# Altium PCB P-MT3620EXMSTLP-1-0.PcbDoc (part 2 of 3)
Units mm, origin at the board's own origin, x right, y up, seen from the top; angles counter-clockwise.
Board outline 50 x 80 mm, 4 copper layers (Top Layer, InternalGND, InternalPWR, Bottom Layer), stack 1.534 mm thick; 92 components, 85 nets, 375 pads, 250 vias.
Unrouted connection lines stored in the file: 17.
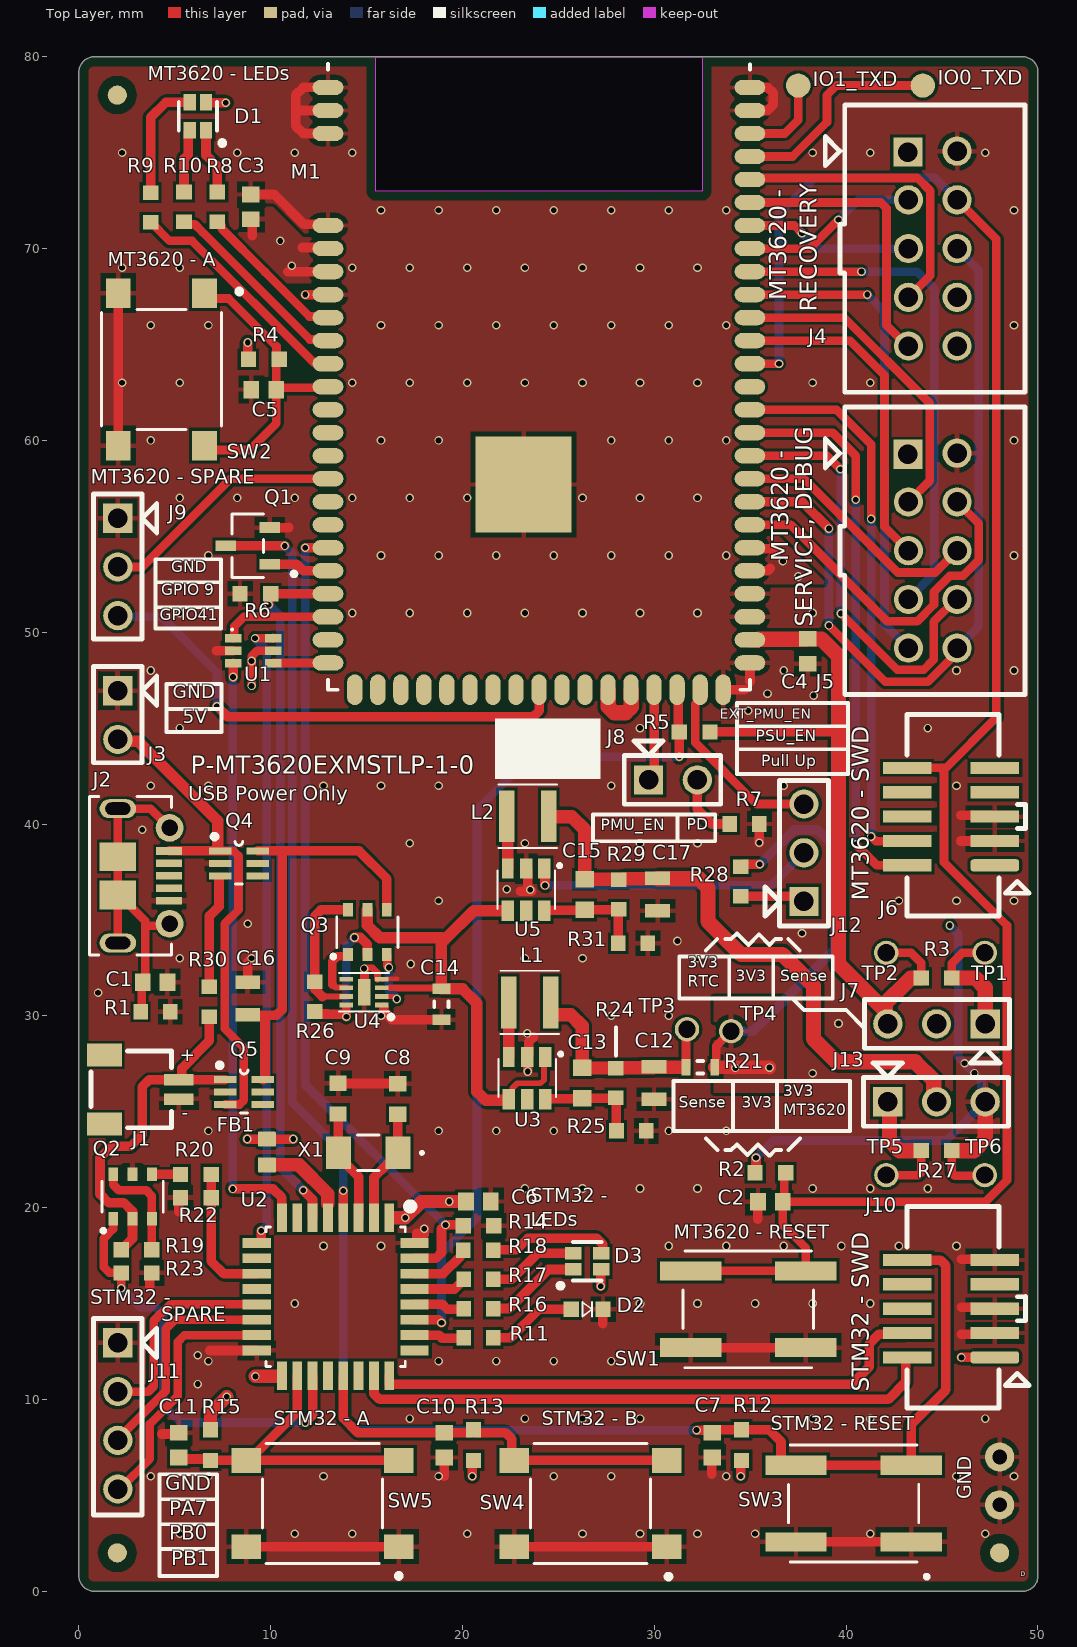
[diagram p0: Top Layer view]

## Part data (continued)
Q2 Q3: "MOSFET N&P-CH 30V (D-S)", Case/Package=TSOP, Continuous Drain Current (ID)=2.5A, Drain to Source Breakdown Voltage=30V, Drain to Source Resistance=170mR, Gate to Source Voltage (Vgs)=12V, Manufacturer="Vishay Siliconix", Max Operating Temperature=150°C, Max Power Dissipation=830mW, Min Operating Temperature=-55°C, Package Quantity=3000, Supplier Part Number 1=SI3590DV-T1-E3DKR-ND, ComponentLink1Description=https://datasheet.ciiva.com/4441/72032-244663-4441688.pdf, ComponentLink1URL=https://datasheet.ciiva.com/4441/72032-244663-4441688.pdf, ComponentLink2Description=https://datasheet.ciiva.com/11158/72032-11158835.pdf, ComponentLink2URL=https://datasheet.ciiva.com/11158/72032-11158835.pdf, ComponentLink3Description=https://datasheet.ciiva.com/6388/72032-6388120.pdf, ComponentLink3URL=https://datasheet.ciiva.com/6388/72032-6388120.pdf, ComponentLink4Description=https://datasheet.ciiva.com/6388/72032-6388117.pdf, ComponentLink4URL=https://datasheet.ciiva.com/6388/72032-6388117.pdf, ComponentLink5Description=https://datasheet.ciiva.com/26145/72032-26145319.pdf, ComponentLink5URL=https://datasheet.ciiva.com/26145/72032-26145319.pdf, Drain to Source Voltage (Vdss)=30V, Fall Time=15ns, Height=1mm, Lead Free="Lead Free", Length=3.05mm, Manufacturer Part Number=SI3590DV-T1-E3, Mount="Surface Mount", Nominal Vgs=600mV, Number of Channels=2, Number of Elements=2, Number of Pins=6, Packaging="Tape and Reel", Power Dissipation=830mW, Pricing 1="1=0.71, 10=0.612, 25=0.5712, 100=0.4568, 250=0.4242, 500=0.3589, 1000=0.2774 (USD)", Radiation Hardening=No, Rds On Max=77mR, REACH SVHC=Unknown, Rise Time=15ns, Stock 1=43293, Supplier 1=Digi-Key, Turn-Off Delay Time=20ns, Turn-On Delay Time=5ns, Weight=0.000705oz, Width=1.65mm
Q4 Q5: "1.5-V to 5.5-V, 1.5-A, 0.5-uA IQ ideal diode with Integrated FET 6-SC70 -40 to 105", Manufacturer="Texas Instruments", Supplier Part Number 1=296-53541-1-ND, Category="Integrated Circuits (ICs)", Manufacturer Part Number=LM66100DCKR, Pricing 1="1=0.41000, 10=0.32900, 25=0.30120, 100=0.20300, 250=0.16800, 500=0.15400, 1000=0.11550 (USD)", RoHS=No, Stock 1=4176, Supplier 1=Digi-Key
R1: library part RC0603FR-071ML, "1M 0603 Case 1% 0.1W 100ppm/C", Case Code (Imperial)=0603, Case Code (Metric)=1608, Manufacturer=Yageo, Max Operating Temperature=155°C, Min Operating Temperature=-55°C, Package Quantity=5000, Power Rating=100mW, Resistance=1MR, Supplier Part Number 1=311-1.00MHRCT-ND, Temperature Coefficient=100ppm/°C, Tolerance=1%, Voltage Rating=50V, Case/Package=0603, Category="Chip SMD Resistors", ComponentLink1Description=https://datasheet.ciiva.com/11819/0900766b80f96399-11819295.pdf?src-supplier=RSComponents, ComponentLink1URL=https://datasheet.ciiva.com/11819/0900766b80f96399-11819295.pdf?src-supplier=RSComponents, ComponentLink2Description=https://datasheet.ciiva.com/7983/443971-7983614.pdf?src-supplier=Element14, ComponentLink2URL=https://datasheet.ciiva.com/7983/443971-7983614.pdf?src-supplier=Element14, ComponentLink3Description=https://datasheet.ciiva.com/12555/rc0603-272842-12555388.pdf?src-supplier=Mouser, ComponentLink3URL=https://datasheet.ciiva.com/12555/rc0603-272842-12555388.pdf?src-supplier=Mouser, Composition="Thick Film", Depth=0.8mm, Height=0.45mm, Lead Free="Lead Free", Length=1.6mm, Manufacturer Part Number=RC0603FR-071ML, Military Standard=Not, Number of Pins=2, Packaging="Tape and Reel", Pricing 1="1=0.10000, 10=0.02300, 100=0.00940, 1000=0.00421, 2500=0.00366 (USD)", REACH SVHC="No SVHC", RoHS=Yes, Stock 1=2071757, Supplier 1=Digi-Key, Termination=SMD/SMT, Voltage Rating (DC)=50V, Width=0.8mm
R2 R4 R5 R6 R12 R13 R15 R19 R23: library part RC0603FR-07100KL, "100K Ohm 0603 1% 0.1W(1/10W) 100ppm Paper T/R", Case Code (Imperial)=0603, Case Code (Metric)=1608, Manufacturer=Yageo, Max Operating Temperature=155°C, Min Operating Temperature=-55°C, Power Rating=100mW, Resistance=100kR, Supplier Part Number 1=311-100KHRCT-ND, Temperature Coefficient=100ppm/°C, Tolerance=1%, Voltage Rating=50V, Working Voltage=75V, Case/Package=0603, Category="Chip SMD Resistors", ComponentLink1Description=https://datasheet.ciiva.com/11808/0900766b80f96399-11808107.pdf?src-supplier=RSComponents, ComponentLink1URL=https://datasheet.ciiva.com/11808/0900766b80f96399-11808107.pdf?src-supplier=RSComponents, ComponentLink2Description=https://datasheet.ciiva.com/7983/443971-7983593.pdf?src-supplier=Element14, ComponentLink2URL=https://datasheet.ciiva.com/7983/443971-7983593.pdf?src-supplier=Element14, ComponentLink3Description=https://datasheet.ciiva.com/46440/1868787-46440889.pdf?src-supplier=Element14, ComponentLink3URL=https://datasheet.ciiva.com/46440/1868787-46440889.pdf?src-supplier=Element14, ComponentLink4Description=https://datasheet.ciiva.com/7746/1738695-7746234.pdf?src-supplier=Element14, ComponentLink4URL=https://datasheet.ciiva.com/7746/1738695-7746234.pdf?src-supplier=Element14, ComponentLink5Description=https://datasheet.ciiva.com/7746/1738695-7746235.pdf?src-supplier=Element14, ComponentLink5URL=https://datasheet.ciiva.com/7746/1738695-7746235.pdf?src-supplier=Element14, ComponentLink6Description=https://datasheet.ciiva.com/22747/443971-22747516.pdf?src-supplier=Element14, ComponentLink6URL=https://datasheet.ciiva.com/22747/443971-22747516.pdf?src-supplier=Element14, Composition="Thick Film", Depth=0.8mm, Height=0.45mm, Lead Free="Lead Free", Length=1.6mm, Manufacturer Part Number=RC0603FR-07100KL, Military Standard=Not, Number of Pins=2, Number of Terminations=2, Packaging="Tape and Reel", Pricing 1="1=0.10000, 10=0.02300, 100=0.00940, 1000=0.00421, 2500=0.00366 (USD)", REACH SVHC="No SVHC", RoHS=Yes, Stock 1=18400350, Supplier 1=Digi-Key, Termination=SMD/SMT, Voltage Rating (DC)=50V, Width=0.8mm
R3: library part PCAN0603E1000BST5, "100 OHM Current Sense 0.1% 1/2W 0603", Case Code (Imperial)=0603, Case Code (Metric)=1608, Manufacturer="Vishay Dale Thin Film", Max Operating Temperature=155°C, Max Power Dissipation=500mW, Min Operating Temperature=-55°C, Supplier Part Number 1=764-1252-1-ND, Temperature Coefficient=25ppm/°C, Tolerance=0.1%, Case/Package=0603, Category="Chip SMD Resistors", ComponentLink1Description=http://www.vishay.com/docs/60125/pcan.pdf?src-supplier=Digi-Key, ComponentLink1URL=http://www.vishay.com/docs/60125/pcan.pdf?src-supplier=Digi-Key, ComponentLink2Description=http://www.vishay.com/docs/49563/_pcan_vmn-pt0416.pdf?src-supplier=Digi-Key, ComponentLink2URL=http://www.vishay.com/docs/49563/_pcan_vmn-pt0416.pdf?src-supplier=Digi-Key, Composition="Thin Film", Features="Moisture Resistant", Height=0.018inch, Length=0.064inch, Manufacturer Part Number=PCAN0603E1000BST5, Number of Terminations=2, Packaging="Tape and Reel", Pricing 1="1=1.31000, 10=1.15900, 100=0.84150 (USD)", Resistance=100R, RoHS=Yes, Stock 1=20633, Supplier 1=Digi-Key, Width=0.032inch
R7 R10 R11 R17: library part RC0603FR-07620RL, "620 Ohm, 0603, 1% 0.1W(1/10W) 100ppm/ C Molded SMD Paper T/R", Case Code (Imperial)=0603, Case Code (Metric)=1608, Manufacturer=Yageo, Max Operating Temperature=155°C, Min Operating Temperature=-55°C, Power Rating=100mW, Supplier Part Number 1=311-620HRCT-ND, Temperature Coefficient=100ppm/°C, Tolerance=1%, Voltage Rating=75V, Voltage Rating (DC)=50V, Case/Package=0603, Category="Chip SMD Resistors", ComponentLink1Description=http://components.arrow.com/part/dataview/0323_00047453?src-supplier=Arrow+Europe, ComponentLink1URL=http://components.arrow.com/part/dataview/0323_00047453?src-supplier=Arrow+Europe, ComponentLink2Description=http://www.mouser.com/ds/2/447/RC0603-272842.pdf?src-supplier=Mouser, ComponentLink2URL=http://www.mouser.com/ds/2/447/RC0603-272842.pdf?src-supplier=Mouser, ComponentLink3Description=http://www.yageo.com/documents/recent/PYu-RC_Group_51_RoHS_L_10.pdf?src-supplier=Digi-Key, ComponentLink3URL=http://www.yageo.com/documents/recent/PYu-RC_Group_51_RoHS_L_10.pdf?src-supplier=Digi-Key, ComponentLink4Description=http://www.yageo.com/documents/recent/PYu-RC0603_51_RoHS_L_7.pdf?src-supplier=Future+Electronics, ComponentLink4URL=http://www.yageo.com/documents/recent/PYu-RC0603_51_RoHS_L_7.pdf?src-supplier=Future+Electronics, ComponentLink5Description=http://www.yageo.com/documents/recent/PYu-RC_Group_51_RoHS_L_9.pdf?src-supplier=Digi-Key, ComponentLink5URL=http://www.yageo.com/documents/recent/PYu-RC_Group_51_RoHS_L_9.pdf?src-supplier=Digi-Key, Composition="Thick Film", Depth=0.8mm, Height=0.45mm, Lead Free="Lead Free", Length=1.6mm, Manufacturer Part Number=RC0603FR-07620RL, Military Standard=Not, Packaging="Tape and Reel", Pricing 1="1=0.10000, 10=0.02300, 100=0.00940, 1000=0.00421, 2500=0.00366 (USD)", Resistance=620R, RoHS=Yes, Stock 1=488, Supplier 1=Digi-Key, Termination=SMD/SMT, Weight=7.1E-05oz, Width=0.8mm
R8 R16: library part RC0603FR-07680RL, "680R, 0603 YAGEO - RC0603FR-07680RL - SMD Chip Resistor, RC Series, 50 V, Thick Film, 100 mW", Case Code (Imperial)=0603, Case Code (Metric)=1608, Manufacturer=Yageo, Max Operating Temperature=155°C, Max Power Dissipation=100mW, Min Operating Temperature=-55°C, Package Quantity=1, Supplier Part Number 1=311-680HRCT-ND, Temperature Coefficient=100ppm/°C, Tolerance=1%, Voltage Rating=50V, Case/Package=0603, Category="Chip SMD Resistors", ComponentLink1Description=https://datasheet.ciiva.com/2553/pyu-r-int-thick-7-2553546.pdf?src-supplier=Digi-Key, ComponentLink1URL=https://datasheet.ciiva.com/2553/pyu-r-int-thick-7-2553546.pdf?src-supplier=Digi-Key, ComponentLink2Description=https://datasheet.ciiva.com/7746/443971-7746389.pdf?src-supplier=Element14, ComponentLink2URL=https://datasheet.ciiva.com/7746/443971-7746389.pdf?src-supplier=Element14, ComponentLink3Description=https://datasheet.ciiva.com/46412/443971-46412854.pdf?src-supplier=Element14, ComponentLink3URL=https://datasheet.ciiva.com/46412/443971-46412854.pdf?src-supplier=Element14, ComponentLink4Description=https://datasheet.ciiva.com/2553/pyu-r-int-thick-7-2553545.pdf?src-supplier=Digi-Key, ComponentLink4URL=https://datasheet.ciiva.com/2553/pyu-r-int-thick-7-2553545.pdf?src-supplier=Digi-Key, ComponentLink5Description=https://datasheet.ciiva.com/2553/pyu-r-int-thick-7-2553547.pdf?src-supplier=Digi-Key, ComponentLink5URL=https://datasheet.ciiva.com/2553/pyu-r-int-thick-7-2553547.pdf?src-supplier=Digi-Key, Composition="Thick Film", Depth=0.8mm, Features="Moisture Resistant", Height=0.022inch, Lead Free="Lead Free", Length=1.6mm, Manufacturer Part Number=RC0603FR-07680RL, Military Standard=Not, Number of Pins=2, Number of Terminations=2, Packaging="Tape and Reel", Power Rating=100mW, Pricing 1="1=0.10000, 10=0.02300, 100=0.00940, 1000=0.00421, 2500=0.00366 (USD)", REACH SVHC="No SVHC", Resistance=680R, RoHS=Yes, Stock 1=2382438, Supplier 1=Digi-Key, Termination=SMD/SMT, Voltage Rating (DC)=50V, Width=0.031inch
R9 R18: library part RC0603FR-07300RL, "300 Ohm, 0603, 1% 0.1W(1/10W) 100ppm/ C Molded SMD Paper T/R", Case Code (Imperial)=0603, Case Code (Metric)=1608, Manufacturer=Yageo, Max Operating Temperature=155°C, Max Power Dissipation=100mW, Min Operating Temperature=-55°C, Package Quantity=1, Supplier Part Number 1=311-300HRCT-ND, Temperature Coefficient=100ppm/°C, Tolerance=1%, Voltage Rating=50V, Working Voltage=75V, Case/Package=0603, Category="Chip SMD Resistors", ComponentLink1Description=https://datasheet.ciiva.com/2454/pyu-r-int-thick-7-2454627.pdf?src-supplier=Digi-Key, ComponentLink1URL=https://datasheet.ciiva.com/2454/pyu-r-int-thick-7-2454627.pdf?src-supplier=Digi-Key, ComponentLink2Description=https://datasheet.ciiva.com/2454/pyu-r-int-thick-7-2454628.pdf?src-supplier=Digi-Key, ComponentLink2URL=https://datasheet.ciiva.com/2454/pyu-r-int-thick-7-2454628.pdf?src-supplier=Digi-Key, ComponentLink3Description=https://datasheet.ciiva.com/2454/pyu-r-int-thick-7-2454629.pdf?src-supplier=Digi-Key, ComponentLink3URL=https://datasheet.ciiva.com/2454/pyu-r-int-thick-7-2454629.pdf?src-supplier=Digi-Key, ComponentLink4Description=https://datasheet.ciiva.com/46395/443971-46395002.pdf?src-supplier=Element14, ComponentLink4URL=https://datasheet.ciiva.com/46395/443971-46395002.pdf?src-supplier=Element14, Composition="Thick Film", Depth=0.8mm, Features="Moisture Resistant", Height=0.022inch, Lead Free="Lead Free", Length=1.6mm, Manufacturer Part Number=RC0603FR-07300RL, Military Standard=Not, Number of Pins=2, Number of Terminations=2, Packaging="Tape and Reel", Power Rating=100mW, Pricing 1="1=0.10000, 10=0.02300, 100=0.00940, 1000=0.00421, 2500=0.00366 (USD)", REACH SVHC=Unknown, Resistance=300R, RoHS=Yes, Stock 1=798546, Supplier 1=Digi-Key, Termination=SMD/SMT, Voltage Rating (DC)=50V, Width=0.8mm
R14 R20 R22: library part RC0603FR-0710KL, "10K Ohm 0603 1% 1/10W ±100ppm/°C Molded SMD Paper T/R", Case Code (Imperial)=0603, Case Code (Metric)=1608, Manufacturer=Yageo, Max Operating Temperature=155°C, Min Operating Temperature=-55°C, Power Rating=100mW, Resistance=10kR, Supplier Part Number 1=9238603, Temperature Coefficient=100ppm/°C, Tolerance=1%, Voltage Rating=75V, Voltage Rating (DC)=50V, Case/Package=0603, Category="Chip SMD Resistors", ComponentLink1Description=https://datasheet.ciiva.com/7660/38590-7660789.pdf?src-supplier=Element14, ComponentLink1URL=https://datasheet.ciiva.com/7660/38590-7660789.pdf?src-supplier=Element14, ComponentLink2Description=https://datasheet.ciiva.com/15189/getdatasheetpartid-409289-15189591.pdf?src-supplier=Verical, ComponentLink2URL=https://datasheet.ciiva.com/15189/getdatasheetpartid-409289-15189591.pdf?src-supplier=Verical, ComponentLink3Description=https://datasheet.ciiva.com/46440/1868787-46440891.pdf?src-supplier=Element14, ComponentLink3URL=https://datasheet.ciiva.com/46440/1868787-46440891.pdf?src-supplier=Element14, ComponentLink4Description=https://datasheet.ciiva.com/7983/443971-7983596.pdf?src-supplier=Element14, ComponentLink4URL=https://datasheet.ciiva.com/7983/443971-7983596.pdf?src-supplier=Element14, ComponentLink5Description=https://datasheet.ciiva.com/7746/1738695-7746239.pdf?src-supplier=Element14, ComponentLink5URL=https://datasheet.ciiva.com/7746/1738695-7746239.pdf?src-supplier=Element14, ComponentLink6Description=https://datasheet.ciiva.com/22747/443971-22747519.pdf?src-supplier=Element14, ComponentLink6URL=https://datasheet.ciiva.com/22747/443971-22747519.pdf?src-supplier=Element14, Composition="Thick Film", Depth=0.8mm, Height=0.45mm, Lead Free="Lead Free", Lead Pitch=0.3mm, Length=1.6mm, Manufacturer Part Number=RC0603FR-0710KL, Military Standard=Not, Number of Pins=2, Packaging="Tape and Reel", Pricing 1="10=0.01950, 100=0.01660, 500=0.01160, 1000=0.00890, 2500=0.00660 (GBP)", REACH SVHC="No SVHC", RoHS=Yes, Stock 1=650865, Supplier 1=Farnell, Termination=SMD/SMT, Weight=7.1E-05oz, Width=0.8mm
R21: library part RC0603JR-070RL, "YAGEO         RC0603JR-070RL             RES, THICK FILM, 0R, 0.1W, 0603", Case Code (Imperial)=0603, Case Code (Metric)=1608, Manufacturer=Yageo, Max Operating Temperature=155°C, Min Operating Temperature=-55°C, Package Quantity=5000, Power Rating=100mW, Resistance=0mR, Supplier Part Number 1=311-0.0GRCT-ND, Temperature Coefficient=200ppm/°C, Tolerance=1%, Voltage Rating=50V, Case/Package=0603, ComponentLink1Description=https://datasheet.ciiva.com/11808/pyu-r-int-6-11808700.pdf, ComponentLink1URL=https://datasheet.ciiva.com/11808/pyu-r-int-6-11808700.pdf, ComponentLink2Description=https://datasheet.ciiva.com/12555/rc0603-272842-12555254.pdf, ComponentLink2URL=https://datasheet.ciiva.com/12555/rc0603-272842-12555254.pdf, ComponentLink3Description=https://datasheet.ciiva.com/22747/443971-22747530.pdf, ComponentLink3URL=https://datasheet.ciiva.com/22747/443971-22747530.pdf, ComponentLink4Description=https://datasheet.ciiva.com/7746/1738695-7746421.pdf, ComponentLink4URL=https://datasheet.ciiva.com/7746/1738695-7746421.pdf, ComponentLink5Description=https://datasheet.ciiva.com/8883/pyu-rc0603-51-rohs-l-4-8883045.pdf, ComponentLink5URL=https://datasheet.ciiva.com/8883/pyu-rc0603-51-rohs-l-4-8883045.pdf, ComponentLink6Description=https://datasheet.ciiva.com/15189/getdatasheetpartid-329462-15189845.pdf, ComponentLink6URL=https://datasheet.ciiva.com/15189/getdatasheetpartid-329462-15189845.pdf, ComponentLink7Description=https://datasheet.ciiva.com/7746/1738695-7746422.pdf, ComponentLink7URL=https://datasheet.ciiva.com/7746/1738695-7746422.pdf, Composition="Thick Film", Contact Plating=Tin,Matte, Depth=0.8mm, Height=0.45mm, Lead Free="Lead Free", Length=1.6mm, Manufacturer Part Number=RC0603JR-070RL, Military Standard=Not, Number of Pins=2, Packaging="Tape and Reel", Pricing 1="1=0.1, 10=0.01, 25=0.0072, 50=0.0056, 100=0.0041, 250=0.0032, 500=0.0025, 1000=0.0019 (USD)", Radiation Hardening=No, REACH SVHC="No SVHC", Stock 1=17127674, Supplier 1=Digi-Key, Termination=SMD/SMT, Voltage Rating (DC)=50V, Width=0.8mm
R24 R29: library part RC0603FR-07150KL, "150 kohm, RC Series, 75 V, Thick Film, 100 mW, YAGEO - RC0603FR-07150KL - SMD Chip Resistor, 0603 [1608 Metric]", Case Code (Imperial)=0603, Case Code (Metric)=1608, Manufacturer=Yageo, Max Operating Temperature=155°C, Max Power Dissipation=100mW, Min Operating Temperature=-55°C, Package Quantity=1, Resistance=150kR, Supplier Part Number 1=311-150KHRCT-ND, Temperature Coefficient=100ppm/°C, Tolerance=1%, Voltage Rating=50V, Case/Package=0603, Category="Chip SMD Resistors", ComponentLink1Description=https://datasheet.ciiva.com/2454/pyu-r-int-thick-7-2454080.pdf?src-supplier=Digi-Key, ComponentLink1URL=https://datasheet.ciiva.com/2454/pyu-r-int-thick-7-2454080.pdf?src-supplier=Digi-Key, ComponentLink2Description=https://datasheet.ciiva.com/15189/getdatasheetpartid-326478-15189611.pdf?src-supplier=Verical, ComponentLink2URL=https://datasheet.ciiva.com/15189/getdatasheetpartid-326478-15189611.pdf?src-supplier=Verical, ComponentLink3Description=https://datasheet.ciiva.com/46412/443971-46412843.pdf?src-supplier=Element14, ComponentLink3URL=https://datasheet.ciiva.com/46412/443971-46412843.pdf?src-supplier=Element14, ComponentLink4Description=https://datasheet.ciiva.com/46440/1868787-46440892.pdf?src-supplier=Element14, ComponentLink4URL=https://datasheet.ciiva.com/46440/1868787-46440892.pdf?src-supplier=Element14, ComponentLink5Description=https://datasheet.ciiva.com/2454/pyu-r-int-thick-7-2454078.pdf?src-supplier=Digi-Key, ComponentLink5URL=https://datasheet.ciiva.com/2454/pyu-r-int-thick-7-2454078.pdf?src-supplier=Digi-Key, ComponentLink6Description=https://datasheet.ciiva.com/7746/443971-7746254.pdf?src-supplier=Element14, ComponentLink6URL=https://datasheet.ciiva.com/7746/443971-7746254.pdf?src-supplier=Element14, ComponentLink7Description=https://datasheet.ciiva.com/2454/pyu-r-int-thick-7-2454079.pdf?src-supplier=Digi-Key, ComponentLink7URL=https://datasheet.ciiva.com/2454/pyu-r-int-thick-7-2454079.pdf?src-supplier=Digi-Key, ComponentLink8Description=https://datasheet.ciiva.com/7746/443971-7746255.pdf?src-supplier=Element14, ComponentLink8URL=https://datasheet.ciiva.com/7746/443971-7746255.pdf?src-supplier=Element14, Composition="Thick Film", Depth=0.8mm, Features="Moisture Resistant", Height=0.022inch, Lead Free="Lead Free", Length=0.063inch, Manufacturer Part Number=RC0603FR-07150KL, Military Standard=Not, Number of Pins=2, Number of Terminations=2, Packaging="Tape and Reel", Power Rating=100mW, Pricing 1="1=0.10000, 10=0.02300, 100=0.00940, 1000=0.00421, 2500=0.00366 (USD)", REACH SVHC="No SVHC", RoHS=Yes, Stock 1=1504722, Supplier 1=Digi-Key, Termination=SMD/SMT, Voltage Rating (DC)=50V, Width=0.031inch
R25 R30 R31: library part RC0603FR-0733K2L, "33.2K OHM 1% 1/10W 0603", Case Code (Imperial)=0603, Case Code (Metric)=1608, Manufacturer=Yageo, Max Operating Temperature=155°C, Min Operating Temperature=-55°C, Power Rating=100mW, Resistance=33.2kR, Supplier Part Number 1=311-33.2KHRCT-ND, Temperature Coefficient=100ppm/°C, Tolerance=1%, Voltage Rating=50V, Case/Package=0603, Category="Chip SMD Resistors", ComponentLink1Description=https://datasheet.ciiva.com/11808/0900766b80f96399-11808316.pdf?src-supplier=RSComponents, ComponentLink1URL=https://datasheet.ciiva.com/11808/0900766b80f96399-11808316.pdf?src-supplier=RSComponents, Composition="Thick Film", Depth=0.8mm, Height=0.45mm, Lead Free="Lead Free", Length=1.6mm, Manufacturer Part Number=RC0603FR-0733K2L, Military Standard=Not, Mount="Surface Mount", Packaging="Tape and Reel", Pricing 1="1=0.10000, 10=0.02300, 100=0.00940, 1000=0.00421, 2500=0.00366 (USD)", RoHS=Yes, Stock 1=1286508, Supplier 1=Digi-Key, Termination=SMD/SMT, Voltage Rating (DC)=50V
R26: library part RL0603FR-070R033L, "0.033 Ohm 0603 1% 0.1W(1/10W) ±1500ppm/C Epoxy Pad SMD Automotive T/R", Case Code (Imperial)=0603, Case Code (Metric)=1608, Manufacturer=Yageo, Max Operating Temperature=125°C, Min Operating Temperature=-55°C, Package Quantity=5000, Power Rating=100mW, Resistance=33mR, Supplier Part Number 1=311-.033QCT-ND, Temperature Coefficient=300ppm/°C, Tolerance=1%, Case/Package=0603, Category="Chip SMD Resistors", ComponentLink1Description=https://datasheet.ciiva.com/8889/pyu-rl-521-rohs-l-5-8889560.pdf?src-supplier=Avnet, ComponentLink1URL=https://datasheet.ciiva.com/8889/pyu-rl-521-rohs-l-5-8889560.pdf?src-supplier=Avnet, ComponentLink2Description=https://datasheet.ciiva.com/28401/pyu-rl-521-rohs-l-5-28401020.pdf?src-supplier=Avnet+Europe, ComponentLink2URL=https://datasheet.ciiva.com/28401/pyu-rl-521-rohs-l-5-28401020.pdf?src-supplier=Avnet+Europe, ComponentLink3Description=https://datasheet.ciiva.com/15328/pyu-rl-521-rohs-l-5-15328893.pdf?src-supplier=Mouser, ComponentLink3URL=https://datasheet.ciiva.com/15328/pyu-rl-521-rohs-l-5-15328893.pdf?src-supplier=Mouser, Composition="Thick Film", Contact Plating=Tin,Matte, Depth=0.8mm, Height=0.45mm, Lead Free="Lead Free", Length=1.6mm, Manufacturer Part Number=RL0603FR-070R033L, Military Standard=Not, Packaging="Tape and Reel", Pricing 1="1=0.52000, 10=0.37500, 100=0.19480, 1000=0.10865 (USD)", Radiation Hardening=No, RoHS=Yes, Stock 1=18260, Supplier 1=Digi-Key, Termination=SMD/SMT, Weight=7.1E-05oz, Width=0.8mm
R27: library part KDV06DR100ET, "0.1 Ohm 0603 0.5% 0.20W Current Sense Rohs Compliant: Yes", Manufacturer=Ohmite, Supplier Part Number 1=3273622, ComponentLink1Description=http://www.farnell.com/datasheets/2838152.pdf?src-supplier=Farnell, ComponentLink1URL=http://www.farnell.com/datasheets/2838152.pdf?src-supplier=Farnell, Manufacturer Part Number=KDV06DR100ET, Pricing 1="1=0.06600, 10=0.03500, 25=0.03000, 50=0.02900, 100=0.02800, 500=0.02700 (GBP)", Stock 1=4787, Supplier 1=Farnell
R28: library part RC0603FR-074K7L, "4.7K OHM 0603 1% 1/10W", Case Code (Imperial)=0603, Case Code (Metric)=1608, Manufacturer=Yageo, Max Operating Temperature=155°C, Min Operating Temperature=-55°C, Power Rating=100mW, Resistance=4.7kR, Supplier Part Number 1=311-4.70KHRCT-ND, Temperature Coefficient=100ppm/°C, Tolerance=1%, Voltage Rating=50V, Case/Package=0603, Category="Chip SMD Resistors", ComponentLink1Description=https://datasheet.ciiva.com/15189/getdatasheetpartid-422754-15189760.pdf?src-supplier=Verical, ComponentLink1URL=https://datasheet.ciiva.com/15189/getdatasheetpartid-422754-15189760.pdf?src-supplier=Verical, ComponentLink2Description=https://datasheet.ciiva.com/22747/443971-22747528.pdf?src-supplier=Element14, ComponentLink2URL=https://datasheet.ciiva.com/22747/443971-22747528.pdf?src-supplier=Element14, ComponentLink3Description=https://datasheet.ciiva.com/7660/38590-7660794.pdf?src-supplier=Element14, ComponentLink3URL=https://datasheet.ciiva.com/7660/38590-7660794.pdf?src-supplier=Element14, ComponentLink4Description=https://datasheet.ciiva.com/7746/1868787-7746365.pdf?src-supplier=Element14, ComponentLink4URL=https://datasheet.ciiva.com/7746/1868787-7746365.pdf?src-supplier=Element14, ComponentLink5Description=https://datasheet.ciiva.com/46440/1868787-46440909.pdf?src-supplier=Element14, ComponentLink5URL=https://datasheet.ciiva.com/46440/1868787-46440909.pdf?src-supplier=Element14, ComponentLink6Description=https://datasheet.ciiva.com/7746/1738695-7746366.pdf?src-supplier=Element14, ComponentLink6URL=https://datasheet.ciiva.com/7746/1738695-7746366.pdf?src-supplier=Element14, Composition="Thick Film", Depth=0.8mm, Height=0.45mm, Lead Free="Lead Free", Lead Pitch=0.3mm, Length=1.6mm, Manufacturer Part Number=RC0603FR-074K7L, Military Standard=Not, Number of Pins=2, Packaging="Tape and Reel", Pricing 1="1=0.10000, 10=0.02300, 100=0.00940, 1000=0.00421, 2500=0.00366 (USD)", REACH SVHC="No SVHC", RoHS=Yes, Stock 1=975603, Supplier 1=Digi-Key, Termination=SMD/SMT, Voltage Rating (DC)=50V, Width=0.8mm
SW1 SW3: "PANASONIC - EVQQ2P03W - SWITCH, SPNO, SMD", Manufacturer=PANASONIC, Manufacturer Part Number=EVQQ2P03W, Max Contact Current DC=20, Max Contact Voltage AC=250, Max Contact Voltage DC=15, Supplier Part Number 1=9962859RL, Category="Switches & Relays", ComponentLink1Description=http://www.farnell.com/datasheets/28111.pdf, ComponentLink1URL=http://www.farnell.com/datasheets/28111.pdf, Contact Configuration=SPNO, Pricing 1="1=0.38, 50=0.29, 100=0.23 (GBP)", RoHS=YES, Series=EVQQ2, Stock 1=3989, Supplier 1=Farnell, Switch Function Type="SPST Push", Terminal Type=SMD
SW2 SW4 SW5: "SWITCH TACTILE SPST-NO 0.05A 12V", Case/Package=SMD/SMT, Color=Black, Contact Resistance=100mR, Current Rating=50mA, Manufacturer="ITT C&K", Max Operating Temperature=60°C, Max Voltage Rating (DC)=12V, Min Operating Temperature=-20°C, Operating Force=160gf, Package Quantity=1, Supplier Part Number 1=CKN9112CT-ND, Actuator Length=0.85mm, Actuator Material=Nylon,Polyamide, Actuator Type=Standard, Category="Tactile Switches", ComponentLink1Description=https://datasheet.ciiva.com/29903/getdatasheetpartid-786341-29903846.pdf?src-supplier=Verical, ComponentLink1URL=https://datasheet.ciiva.com/29903/getdatasheetpartid-786341-29903846.pdf?src-supplier=Verical, ComponentLink2Description=https://datasheet.ciiva.com/29931/getdatasheetpartid-764615-29931183.pdf?src-supplier=Verical, ComponentLink2URL=https://datasheet.ciiva.com/29931/getdatasheetpartid-764615-29931183.pdf?src-supplier=Verical, ComponentLink3Description=https://datasheet.ciiva.com/14920/pts645-14920733.pdf?src-supplier=Digi-Key, ComponentLink3URL=https://datasheet.ciiva.com/14920/pts645-14920733.pdf?src-supplier=Digi-Key, ComponentLink4Description=https://datasheet.ciiva.com/14920/pts645-14920734.pdf?src-supplier=Digi-Key, ComponentLink4URL=https://datasheet.ciiva.com/14920/pts645-14920734.pdf?src-supplier=Digi-Key, ComponentLink5Description=https://datasheet.ciiva.com/14920/pts645-14920735.pdf?src-supplier=Digi-Key, ComponentLink5URL=https://datasheet.ciiva.com/14920/pts645-14920735.pdf?src-supplier=Digi-Key, Contact Material=Silver, Contact Plating=Silver, Depth=9mm, Illumination Type=Non-Illuminated,Illuminated, Lead Free="Lead Free", Length=6mm, Manufacturer Part Number=PTS645SM43SMTR92LFS, Max Current Rating=50mA, Mechanical Life=100000Cycles, Mount="Surface Mount", Orientation=Straight, Packaging="Tape and Reel", Pricing 1="1=0.28000, 10=0.26600, 25=0.25240, 100=0.22860, 250=0.20840, 500=0.19372 (USD)", REACH SVHC="No SVHC", RoHS=Yes, Stock 1=233515, Supplier 1=Digi-Key, Switch Function=Off-Mom, Termination="Gull Wing", Throw Configuration=SPST, Voltage Rating (DC)=12V
TP1 TP2 TP3 TP4 TP5 TP6: "Test Point With Hole"
U1: "Buffers & Line Drivers LVC 2 Gates LOGIC", Case/Package=SOT-363, High Level Output Current=-32mA, Low Level Output Current=32mA, Manufacturer=Diodes, Max Operating Temperature=125°C, Max Supply Voltage=5.5V, Min Operating Temperature=-40°C, Min Supply Voltage=1.65V, Operating Supply Current=10uA, Package Quantity=1, Quiescent Current=40uA, Supplier Part Number 1=74LVC2G17DW-7DICT-ND, Category="Buffers, Drivers and Transceivers", ComponentLink1Description=http://www.mouser.com/ds/2/115/74LVC2G17-219457.pdf?src-supplier=Mouser, ComponentLink1URL=http://www.mouser.com/ds/2/115/74LVC2G17-219457.pdf?src-supplier=Mouser, ComponentLink2Description=http://components.arrow.com/part/dataview/0323_05864131?src-supplier=Arrow+Europe, ComponentLink2URL=http://components.arrow.com/part/dataview/0323_05864131?src-supplier=Arrow+Europe, ComponentLink3Description=http://components.arrow.com/part/dataview/51721233S9314827N2867?src-supplier=Arrow+Electronics, ComponentLink3URL=http://components.arrow.com/part/dataview/51721233S9314827N2867?src-supplier=Arrow+Electronics, ComponentLink4Description=https://www.verical.com/server-webapp/html/getDatasheet?partID=688709&src-supplier=Verical, ComponentLink4URL=https://www.verical.com/server-webapp/html/getDatasheet?partID=688709&src-supplier=Verical, ComponentLink5Description=https://www.diodes.com/assets/Datasheets/74LVC2G17.pdf?src-supplier=Digi-Key, ComponentLink5URL=https://www.diodes.com/assets/Datasheets/74LVC2G17.pdf?src-supplier=Digi-Key, ComponentLink6Description=http://www.diodes.com/datasheets/74LVC2G17.pdf?src-supplier=Avnet, ComponentLink6URL=http://www.diodes.com/datasheets/74LVC2G17.pdf?src-supplier=Avnet, Logic Function="Schmitt Trigger,Buffer,Inverting", Manufacturer Part Number=74LVC2G17DW-7, Mount="Surface Mount", Number of Bits per Element=1, Number of Channels=2, Number of Elements=2, Number of Input Lines=1, Number of Inputs=2, Number of Output Lines=1, Number of Outputs=2, Number of Pins=6, Packaging="Tape and Reel", Polarity=Non-Inverting, Pricing 1="1=0.42000, 10=0.31400, 25=0.28320, 100=0.19570, 250=0.16484, 500=0.13392, 1000=0.10302 (USD)", Propagation Delay=13.1ns, Radiation Hardening=No, REACH SVHC="No SVHC", RoHS=Yes, Stock 1=12109, Supplier 1=Digi-Key, Turn-On Delay Time=13.1ns, Weight=0.000212oz
U2: "IC MCU 32BIT 32KB FLASH 32LQFP", Case/Package=LQFP, Frequency=32MHz, Manufacturer=STMicroelectronics, Max Operating Temperature=85°C, Max Supply Voltage=3.6V, Min Operating Temperature=-40°C, Min Supply Voltage=1.65V, Package Quantity=1500, Supplier Part Number 1=497-17486-ND, Category=Microcontrollers, ComponentLink1Description=https://datasheet.ciiva.com/70238/en-dm00140359-70238919.pdf?src-supplier=Digi-Key, ComponentLink1URL=https://datasheet.ciiva.com/70238/en-dm00140359-70238919.pdf?src-supplier=Digi-Key, Core Architecture=ARM, Data Bus Width=32b, Interface=I2C,SPI,UART, Manufacturer Part Number=STM32L031K6T6, Max Frequency=32MHz, Memory Size=32KB, Memory Type=FLASH, Number of ADC Channels=10, Number of I/Os=38, Oscillator Type=Internal, Packaging=Tray, Peripherals="Brown-out Detect/Reset,POR,PWM,WDT,DMA", Pricing 1="1=2.86000, 10=2.56800, 25=2.42240, 100=2.06400, 250=1.93800, 500=1.69576, 1000=1.40505, 2500=1.30815, 5000=1.25970 (USD)", RAM Size=8KB, RoHS=No, Stock 1=2601, Supplier 1=Digi-Key
U3 U5: "Variable voltage buck converter", Case/Package=SOT-23-5, Manufacturer="Texas Instruments", Max Operating Temperature=125°C, Min Operating Temperature=-40°C, Supplier Part Number 1=296-47360-6-ND, Manufacturer Part Number=TLV62569DBVR, Pricing 1="1=1.32, 10=1.176, 100=0.9168, 500=0.75736, 1000=0.59792 (USD)", Stock 1=4987, Supplier 1=Digi-Key
U4: library part LTC4361CDC-1#TRMPBF, "LINEAR TECHNOLOGY LTC4361CDC-1#TRMPBF IC, OVERVOLTAGE/CUR PROT, 8DFN", Current Limit=-, Manufacturer="Linear Technology", Operating Temperature="0°C ~ 70°C", Package / Case="8-WFDFN Exposed Pad", Standard Package=1, Supplier Device Package="8-DFN (2x2)", Supplier Part Number 1=LTC4361CDC-1#TRMPBFDKR-ND, Voltage - Supply="2.5 V ~ 5.5 V", Applications="General Purpose", Category="Integrated Circuits (ICs)", ComponentLink1Description=https://datasheet.ciiva.com/1511/1692593-1511384.pdf, ComponentLink1URL=https://datasheet.ciiva.com/1511/1692593-1511384.pdf, ComponentLink2Description=https://datasheet.ciiva.com/1941/29266-1941720.pdf, ComponentLink2URL=https://datasheet.ciiva.com/1941/29266-1941720.pdf, ComponentLink3Description=https://datasheet.ciiva.com/1941/29266-1941721.pdf, ComponentLink3URL=https://datasheet.ciiva.com/1941/29266-1941721.pdf, ComponentLink4Description=https://datasheet.ciiva.com/1569/1441932-1569140.pdf, ComponentLink4URL=https://datasheet.ciiva.com/1569/1441932-1569140.pdf, ComponentLink5Description=https://datasheet.ciiva.com/1569/1441932-1569141.pdf, ComponentLink5URL=https://datasheet.ciiva.com/1569/1441932-1569141.pdf, ComponentLink6Description=https://datasheet.ciiva.com/1941/29266-1941719.pdf, ComponentLink6URL=https://datasheet.ciiva.com/1941/29266-1941719.pdf, Dynamic Catalog="Overvoltage, Overcurrent Protection", Family="PMIC - Hot Swap, PoE Controllers", Featured Product="LTC436x Series Overvoltage / Overcurrent Protection Controllers", Internal Switch(s)=No, Manufacturer Part Number=LTC4361CDC-1#TRMPBF, Mounting Type="Surface Mount", Other Names=LTC4361CDC-1#TRMPBFCT, Packaging="Cut Tape (CT)", Pricing 1="1=3.46, 25=3.0904, 100=2.04, 250=1.87 (USD)", Product Training Modules="LTC4360 LTC4361 LTC4362 Overview", Series=-, Stock 1=274, Supplier 1=Digikey, Type="Overvoltage and Overcurrent Controller"
X1: library part NX3215SA-32.768KHZ-EXS00A-MU00525, "CRYSTAL 32.768KHZ 6PF SMD", Case/Package=SMD/SMT, ESR (Equivalent Series Resistance)=70kR, Load Capacitance=6pF, Manufacturer=NDK, Max Operating Temperature=85°C, Min Operating Temperature=-40°C, Ratings=AEC-Q200, Supplier Part Number 1=644-1386-1-ND, Frequency=32.768kHz, Manufacturer Part Number=NX3215SA-32.768KHZ-EXS00A-MU00525, Mount="Surface Mount", Packaging="Tape and Reel", Pricing 1="1=0.68000, 10=0.60200, 50=0.56280, 100=0.49740, 500=0.47124, 1000=0.39270 (USD)", RoHS=No, Stock 1=6963, Supplier 1=Digi-Key

## Free pads (board coordinates)
  round 1 smd paste-1 mask+0.5: 1(2,2) 1(2,78) 1(48,2)
  round 1.524 hole 0.762: 4(48,4.5) 4(48,7)

## Via types
v1: diameter 0.45, hole 0.3, Top Layer to Bottom Layer, tented both sides, 250 vias

## Nets (pads, with @x,y where several pads share a name; then routed paths per layer and width w, separated by ;. In a path a pad name is that pad's centre, name@x,y a point inside that pad or via, vN(x,y) a via of type N, cw(c..) or ccw(c..) an arc to the next point about the centre after c; other vN are vias at no path point)
3V3_AON: C6.2 D3.4 FB1.1 J7.2 J10.1 R12.2 R13.2 R15.2 R21.2 R28.2 TP4.1 U2.1 U2.17 | length 38
  Top Layer w0.45: R21.2@33.236,27.404 33.236,28.436 TP4.1@34,29.2
  Top Layer w0.5: v1@8.775,23.575 FB1.1@9.8,23.575 v1(11.175,23.575) ; U2.17@10.35,11.2 10.577,11.427 10.581,11.423 U2.17@10.581,11.24 ; v1(20.5,6) 20.5,6.746 R13.2@20.574,6.82 ; v1(27.2,15.9) 27.2,16.75 D3.4@27.225,16.775 ; v1(34.5,6) 34.5,6.776 R12.2@34.544,6.82 ; R28.2@34.5,37.8 34.6,37.9 v1(35.5,37.9) ; v1@46,12.2 v1(46.008,12.192) J10.1@47.752,12.192
  Top Layer w0.7: R15.2@6.858,8.42 6.86,8.422 6.86,9.303 v1(7.7,10.143) ; v1(9.2,11.2) U2.17@10.35,11.2 ; 16.44,19.47 v1@16.943,19.47 ; v1(17.014,19.47) 17.864,20.32 C6.2@20.18,20.32 ; R21.2@33.151,27.319 v1@34.225,27.319 ; v1(34.225,27.284) 34.259,27.319 35.981,27.319 v1(36,27.3)
  Bottom Layer w0.5: TP4.1@34,29.2 35.147,29.2 v1(36.02,30.073) 39.4,33.453 39.4,38.8 38.5,39.7 37.3,39.7 v1(35.5,37.9)
  other v1: 19.3,20.32 8.774,23.576